# Altium PCB PCB1.PcbDoc
Units mm, origin at the board's own origin, x right, y up, seen from the top; angles counter-clockwise.
Board outline 95.76 x 55.24 mm, 2 copper layers (Top Layer, Bottom Layer); 31 components, 41 nets, 131 pads, 287 vias.
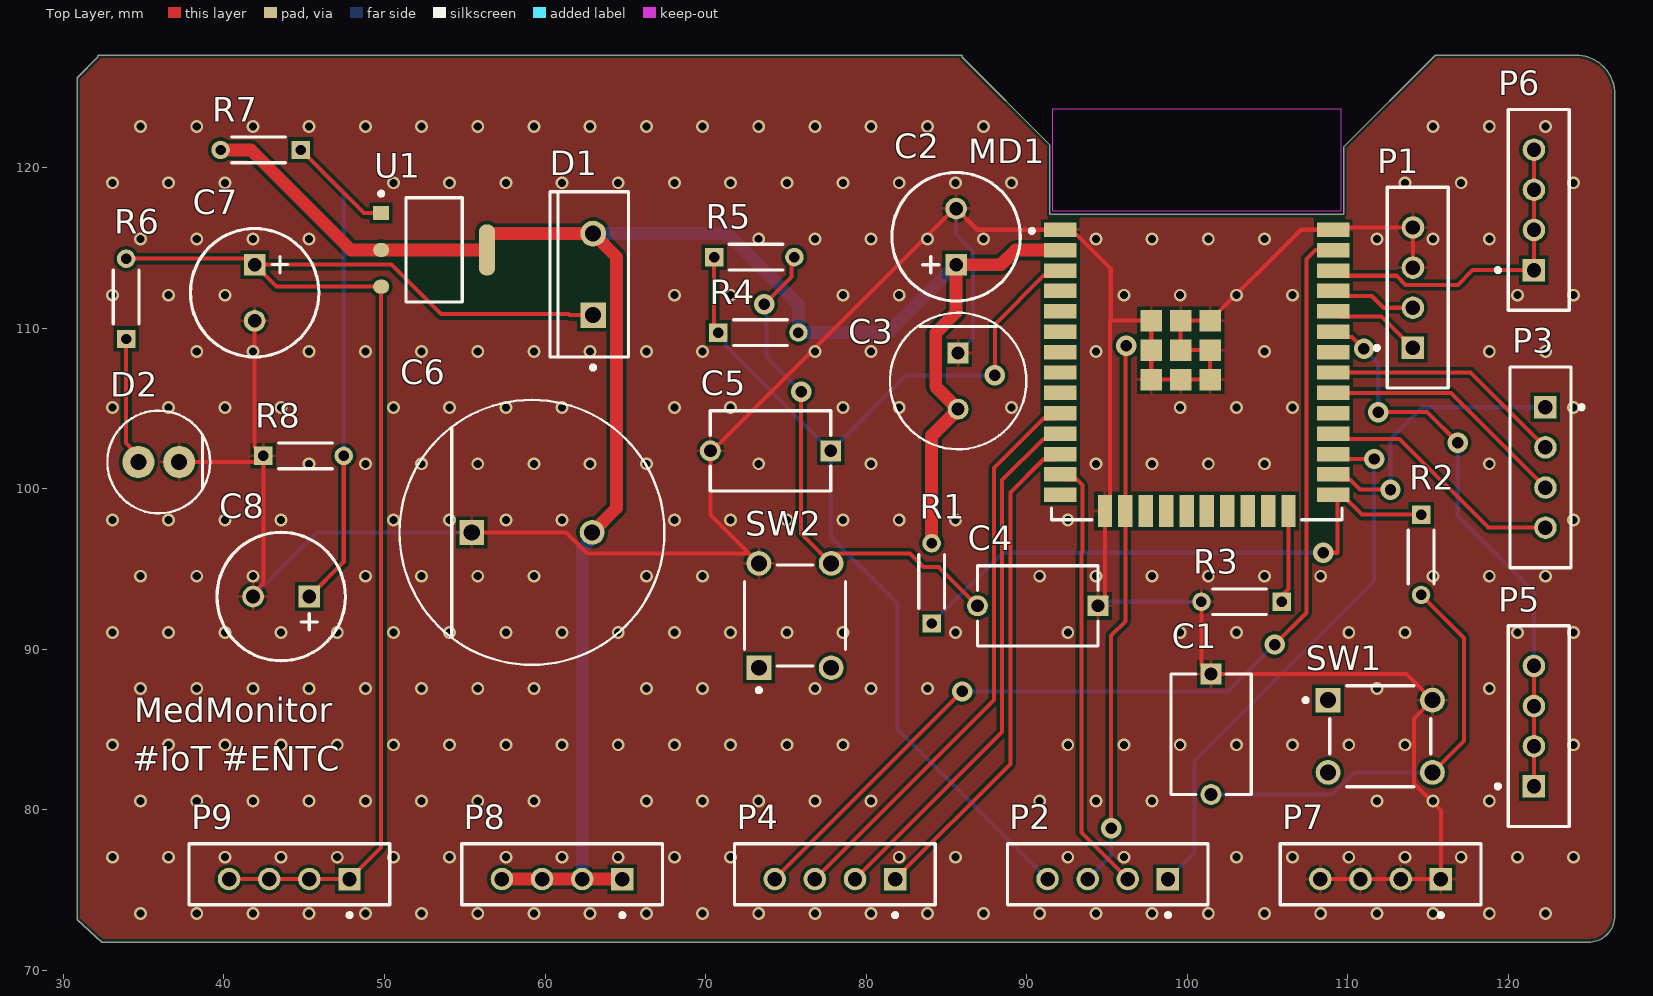
[diagram p0: Top Layer view]
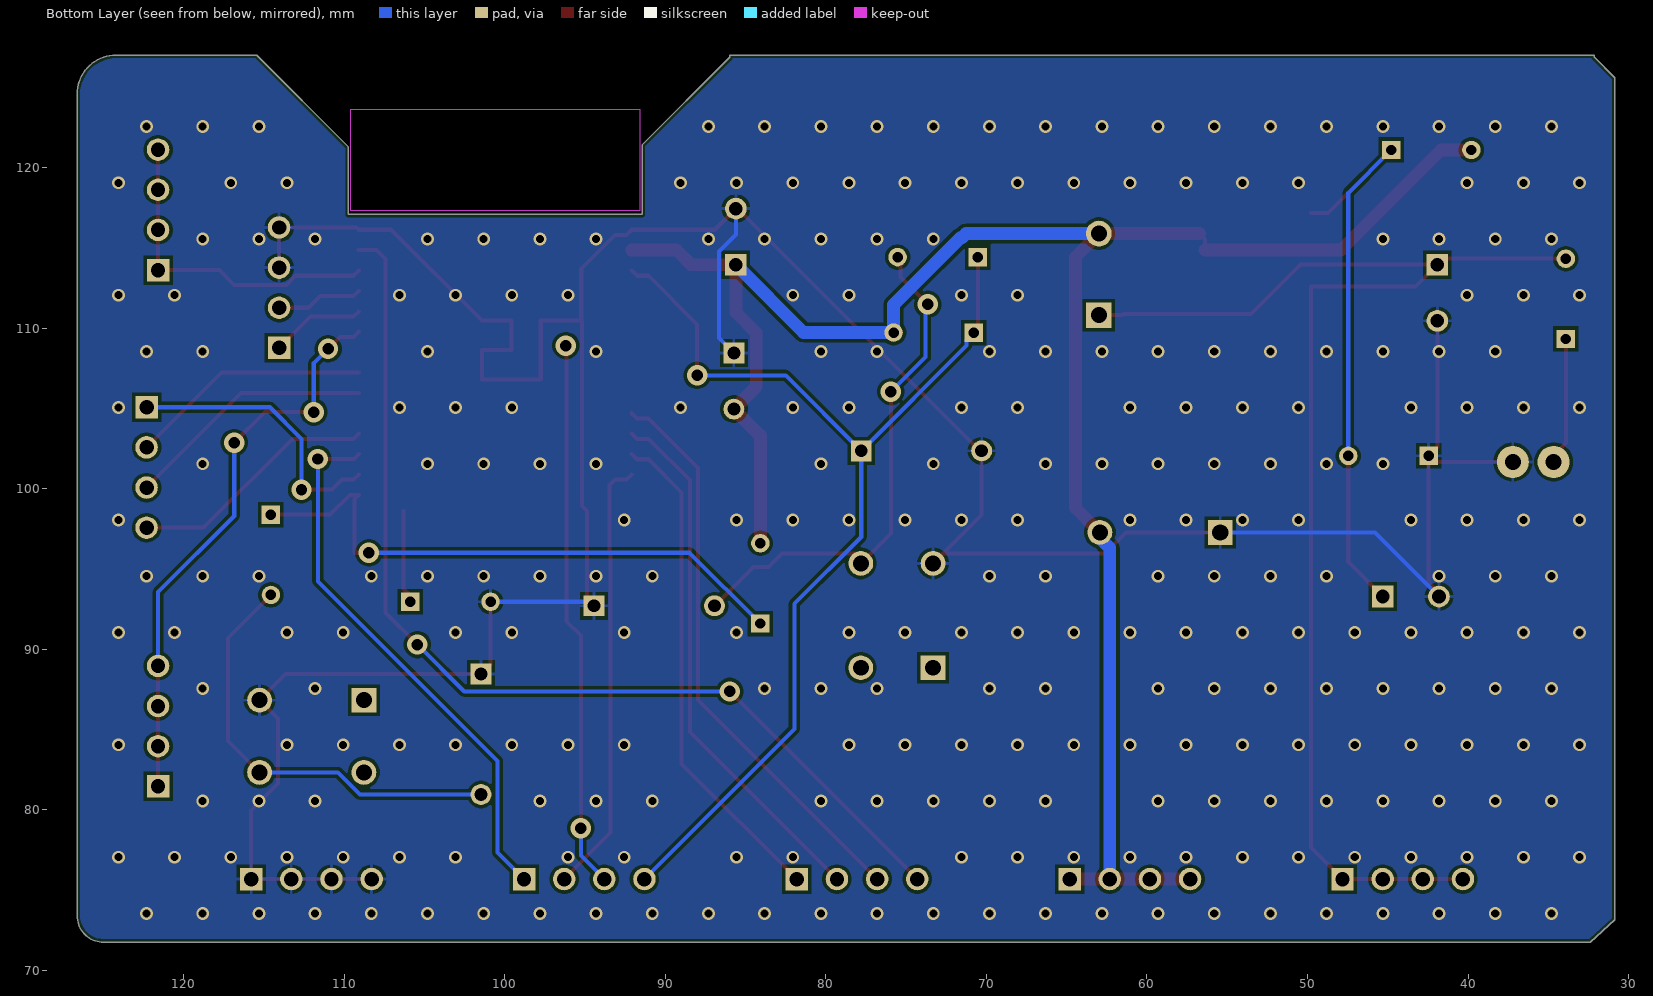
[diagram p1: Bottom Layer view, seen from below]
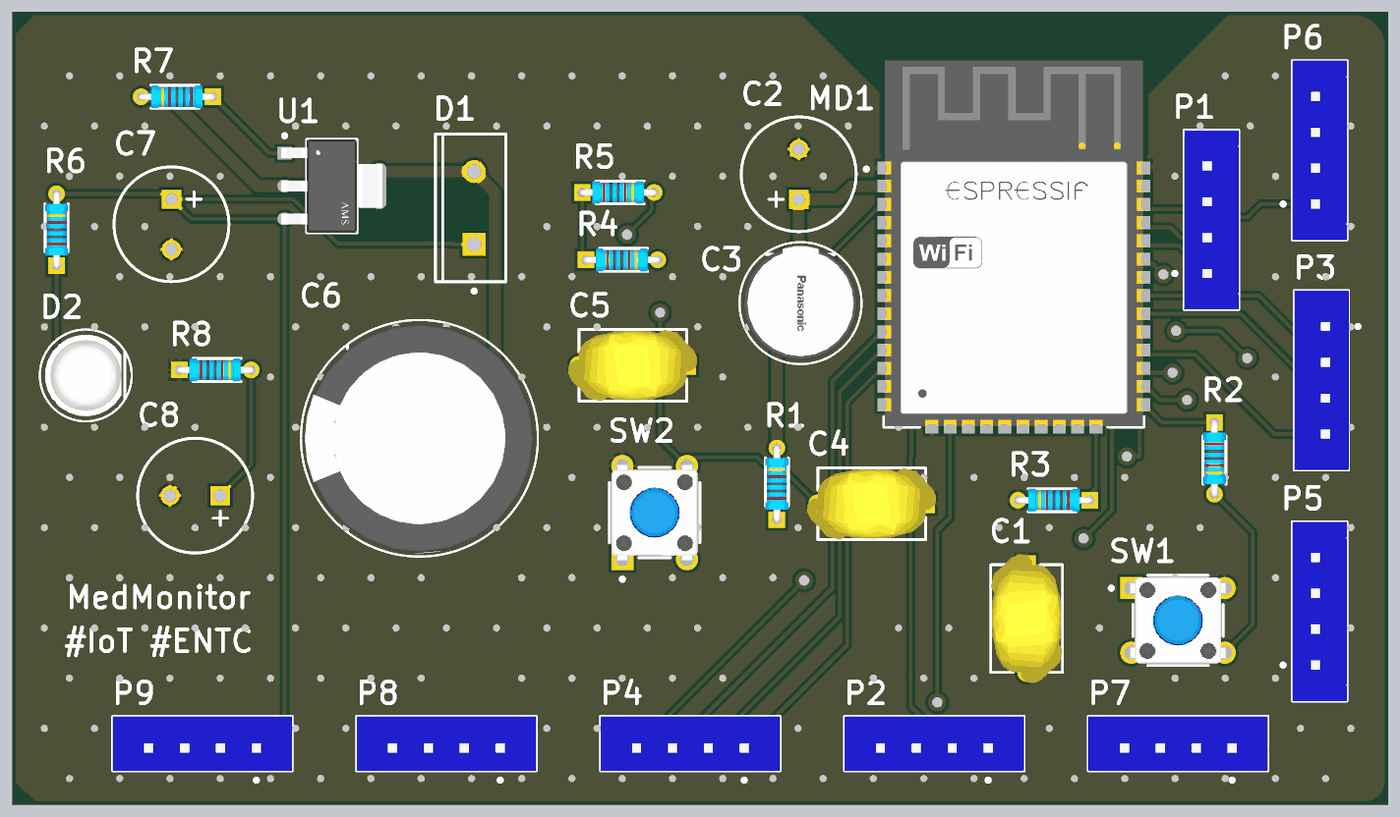
[diagram p2: 3D render of the assembled board from above, using the file's embedded part models]

## Layer stack, top to bottom
Top Solder: solder mask 0.0102, Solder Resist, Dk 3.5
Top Layer: signal copper 0.0356
Dielectric 1: dielectric 0.32, FR-4, Dk 4.8
Bottom Layer: signal copper 0.0356
Bottom Solder: solder mask 0.0102, Solder Resist, Dk 3.5

## Board outline
85.979,127 85.979,126.873 91.44,121.412 91.44,117.094 109.728,117.094 109.728,121.285 115.443,127 124.206,127 cw(c124.206,124.587) 126.619,124.587 126.619,73.406 cw(c124.968,73.406) 124.968,71.755 32.385,71.755 30.861,73.152 30.861,125.603 32.131,126.873 32.131,127

## Design rules (kind name [scope] priority, off if disabled: settings)
BoardOutlineClearance [All] p1: gap=0.2 ignorepadtopadclearanceinfootprint=FALSE
Clearance [All] p1: gap=0.203 ignorepadtopadclearanceinfootprint=FALSE except(0.25: Arc-Hole Track-Hole SMDPad-Hole THPad-Hole Via-Hole Fill-Hole Poly-Hole Region-Hole Text-Hole)
ComponentClearance [All] p1: gap=0.127 collisioncheckmode=3 verticalgap=0.127 showdistances=TRUE
DiffPairsRouting [All] p1: maxlimit=0.381 minlimit=0.203 mostfreqgap=0.203 toplayer_minwidth=0.203 toplayer_maxwidth=25.4 toplayer_prefwidth=0.203 bottomlayer_minwidth=0.203 bottomlayer_maxwidth=25.4 bottomlayer_prefwidth=0.203 maxuncoupledlength=12.7
Height [All] p1: minheight=0 maxheight=1816.048 prefheight=12.7
HoleSize [All] p1: absolutevalues=TRUE maxlimit=6.3 minlimit=0.3 maxpercent=80.000 minpercent=20.000
HoleToHoleClearance [All] p1: gap=0.25 allowstackedmicrovias=FALSE
MinimumAnnularRing [All] p1: minimumring=0.076
MinimumSolderMaskSliver [All] p1: minsoldermaskwidth=0
PlaneClearance [All] p1: clearance=0.203
PlaneConnect PlaneConnectPowerPads [InPadClass('PowerPads')] p1: planeconnectstyle=Direct reliefexpansion=0.508 reliefentries=4 reliefconductorwidth=0.254 reliefairgap=0.254
PlaneConnect [All] p2: pad.planeconnectstyle=Relief pad.reliefexpansion=0.3 pad.reliefentries=4 pad.reliefconductorwidth=0.203 pad.reliefairgap=0.203 via.planeconnectstyle=Direct via.reliefexpansion=0.3 via.reliefentries=4 via.reliefconductorwidth=0.127 via.reliefairgap=0.127
PolygonConnect PolygonConnectPowerPads [All vs (InPadClass('PowerPads'))] p1: connectstyle=Direct reliefconductorwidth=0.254 reliefentries=4 polygonreliefangle="90 Angle" airgapwidth=0.254
PolygonConnect [All] p2: thpad.connectstyle=Relief thpad.reliefconductorwidth=0.203 thpad.reliefentries=4 thpad.polygonreliefangle="90 Angle" thpad.airgapwidth=0.203 smdpad.connectstyle=Relief smdpad.reliefconductorwidth=0.203 smdpad.reliefentries=4 smdpad.polygonreliefangle="90 Angle" smdpad.airgapwidth=0.203 via.connectstyle=Direct via.reliefconductorwidth=0.127 via.reliefentries=4 via.polygonreliefangle="90 Angle" via.airgapwidth=0.127
RoutingVias [All] p1: holewidth=0.3 width=0.6 viastyle="Through Hole" minholewidth=0.3 minwidth=0.6 maxholewidth=0.6 maxwidth=6.6
SilkToSilkClearance [All] p1: silktosilkclearance=0
SilkToSolderMaskClearance [IsPad] p1: minsilkscreentomaskgap=0.127 clearancetoexposedcopper=TRUE
SolderMaskExpansion [All] p1: expansion=0.075 istentingtop=FALSE
Width [All] p1: maxlimit=25.4 minlimit=0.203 preferedwidth=0.203 minimp=50.000000 maximp=50.000000 favimp=50.000000
20 further rules are at their usual default settings.

## Components (designator, comment, footprint, x,y, rotation, side; value= is the part's Value field where it differs from the comment)
C1 "1nF" FP-VY2102M29Y5US6TV7-MFG 101.473,84.709 r270 top
C2 "100uF" NIC-RNS-8x11.5-2_V 85.598,115.697 r90 top
C3 "1uF" FP-ECA-2WHG010-MFG 85.725,106.708 r270 top
C4 "1nF" FP-VY2102M29Y5US6TV7-MFG 90.678,92.71 r180 top
C5 "1nF" FP-VY2102M29Y5US6TV7-MFG 74.041,102.362 r180 top
C6 "22uF" FP-RAD-TH-D_16_0_5-L_20_2-MFG 59.182,97.282 r0 top
C7 "10uF" NIC-RNS-8x11.5-2_V 41.91,112.208 r270 top
C8 "10uF" NIC-RNS-8x11.5-2_V 43.561,93.285 r180 top
D1 "BYW80-200G" ONSC-TO-220-2-221B-04_E 62.992,113.351 r180 top
D2 "SFH 4550" FP-SFH_4550-MFG 35.941,101.667 r180 top
MD1 "ESP32-WROOM-32D" FP-ESP32-WROOM-32D-MFG 100.584,110.871 r0 top
P1 "B4B-EH-A(LF)(SN)" JST-B4B-EH-A_V 114.046,112.522 r90 top
P2 "B4B-EH-A(LF)(SN)" JST-B4B-EH-A_V 95.043,75.692 r180 top
P3 "B4B-EH-A(LF)(SN)" JST-B4B-EH-A_V 122.301,101.326 r270 top
P4 "B4B-EH-A(LF)(SN)" JST-B4B-EH-A_V 78.051,75.692 r180 top
P5 "B4B-EH-A(LF)(SN)" JST-B4B-EH-A_V 121.587,85.217 r90 top
P6 "B4B-EH-A(LF)(SN)" JST-B4B-EH-A_V 121.587,117.368 r90 top
P7 "B4B-EH-A(LF)(SN)" JST-B4B-EH-A_V 112.034,75.692 r180 top
P8 "B4B-EH-A(LF)(SN)" JST-B4B-EH-A_V 61.06,75.692 r180 top
P9 "B4B-EH-A(LF)(SN)" JST-B4B-EH-A_V 44.069,75.692 r180 top
R1 "5k" FP-MRS1600-MFG 84.074,94.107 r90 top
R2 "470Ohm" FP-MRS1600-MFG 114.554,95.885 r270 top
R3 "5k" FP-MRS1600-MFG 103.378,92.964 r180 top
R4 "12k" FP-MRS1600-MFG 73.279,109.728 r0 top
R5 "470Ohm" FP-MRS1600-MFG 73.025,114.427 r0 top
R6 "2k" FP-MRS1600-MFG 33.909,111.827 r90 top
R7 "330" FP-MRS1600-MFG 42.291,121.098 r180 top
R8 "540" FP-MRS1600-MFG 44.958,102.048 r0 top
SW1 "1-1825910-0" FP-1-1825910-0-MFG 112.014,84.582 r180 top
SW2 "1-1825910-0" FP-1-1825910-0-MFG 75.565,92.102 r270 top
U1 "AMS1117-3.3" FP-AMS1117-IPC_C 53.086,114.875 r0 top

## Footprints (in the part's own frame and the unit in brackets; to place one, negate y for a bottom-side part, rotate by r counter-clockwise, add the part's x,y. Pads: shape width x height; smd on the part's side, far side on the other; paste and mask are expansions set on the pad)
FP-1-1825910-0-MFG [mm]
  rect 1.54x1.54 hole 0.99 paste-2539.97 mask+0: 1(3.25,-2.25)
  round 1.54 hole 0.99 paste-2539.97 mask+0: 2(-3.25,-2.25) 3(3.25,2.25) 4(-3.25,2.25)
  silkscreen extent -3.14,-3.14 4.77,3.14, body extent -4.12,-3.24 4.12,3.24, height 0.25
FP-AMS1117-IPC_C [mm]
  rect 1.004x0.872 smd paste+0 mask+0: 1(-3.295,2.29)
  rrect100% 1.004x0.872 smd paste+0 mask+0: 2(-3.295,0) 3(-3.295,-2.29)
  rrect87% 1.004x3.182 smd paste+0 mask+0: 4(3.295,0)
  silkscreen extent -3.42,-3.25 1.75,3.62, body extent -3.9,-3.35 3.9,3.35, height 0.25
FP-ECA-2WHG010-MFG [mm]
  rect 1.3x1.3 hole 0.8 paste-2539.97 mask+0: 1(-1.75,0)
  round 1.3 hole 0.8 paste-2539.97 mask+0: 2(1.75,0)
  silkscreen extent -4.25,-4.25 4.25,4.25, body extent -4.35,-4.35 4.35,4.35, height 0.25
FP-ESP32-WROOM-32D-MFG [mm]
  rect 2x0.9 smd paste+0 mask+0: 1(-8.5,5.26) 2(-8.5,3.99) 3(-8.5,2.72) 4(-8.5,1.45) 5(-8.5,0.18) 6(-8.5,-1.09) 7(-8.5,-2.36) 8(-8.5,-3.63) 9(-8.5,-4.9) 10(-8.5,-6.17) 11(-8.5,-7.44) 12(-8.5,-8.71) 13(-8.5,-9.98) 14(-8.5,-11.25) 25(8.5,-11.25) 26(8.5,-9.98) 27(8.5,-8.71) 28(8.5,-7.44) 29(8.5,-6.17) 30(8.5,-4.9) 31(8.5,-3.63) 32(8.5,-2.36) 33(8.5,-1.09) 34(8.5,0.18) 35(8.5,1.45) 36(8.5,2.72) 37(8.5,3.99) 38(8.5,5.26)
  rect 0.9x2 smd paste+0 mask+0: 15(-5.715,-12.25) 16(-4.445,-12.25) 17(-3.175,-12.25) 18(-1.905,-12.25) 19(-0.635,-12.25) 20(0.635,-12.25) 21(1.905,-12.25) 22(3.175,-12.25) 23(4.445,-12.25) 24(5.715,-12.25)
  rect 1.33x1.33 smd paste+0 mask+0: 39(-2.835,-4.075) 39(-2.835,-2.24) 39(-2.835,-0.405) 39(-1,-4.075) 39(-1,-2.24) 39(-1,-0.405) 39(0.835,-4.075) 39(0.835,-2.24) 39(0.835,-0.405)
  Keep-Out Layer region: -9,6.45 9,6.45 9,12.75 -9,12.75
  Keep-Out Layer region: -9,6.45 9,6.45 9,12.75 -9,12.75
  silkscreen extent -10.4,-12.8 9.05,5.31, body extent -9.6,-13.35 9.6,12.9, height 0.25
FP-MRS1600-MFG [mm]
  rect 1.15x1.15 hole 0.65 paste-2539.97 mask+0: 1(-2.5,0)
  round 1.15 hole 0.65 paste-2539.97 mask+0: 2(2.5,0)
  silkscreen extent -1.55,-0.8 1.8,0.8, body extent -3.17,-0.9 3.17,0.9, height 0.25
FP-RAD-TH-D_16_0_5-L_20_2-MFG [mm]
  rect 1.55x1.55 hole 1 paste-2539.97 mask+0: 1(-3.75,0)
  round 1.55 hole 1 paste-2539.97 mask+0: 2(3.75,0)
  silkscreen extent -8.25,-8.25 8.25,8.25, body extent -8.35,-8.35 8.35,8.35, height 0.25
FP-SFH_4550-MFG [mm]
  round 2 hole 1 paste-2539.97 mask+0: 1(-1.27,0) 2(1.27,0)
  silkscreen extent -3.2,-3.2 3.2,3.2, body extent -3.05,-3.05 3.05,3.05, height 0.25
FP-VY2102M29Y5US6TV7-MFG [mm]
  rect 1.3x1.3 hole 0.8 paste-2539.97 mask+0: 1(-3.75,0)
  round 1.3 hole 0.8 paste-2539.97 mask+0: 2(3.75,0)
  silkscreen extent -3.75,-2.5 3.75,2.5, body extent -4.5,-2.6 4.5,2.6, height 0.25
JST-B4B-EH-A_V [mm] "Header, 4-Leads, Body 12.5x3.8mm, Pitch 2.5mm"
  rect 1.4x1.4 hole 0.9: 1(-3.75,0)
  round 1.4 hole 0.9: 2(-1.25,0) 3(1.25,0) 4(3.75,0)
  silkscreen extent -6.25,-2.2 6.25,2.37, body extent -6.25,-2.2 6.25,1.6, height 6
NIC-RNS-8x11.5-2_V [mm] "THD, 2-Leads, Dia 8mm, Body Length 11.5mm, Pin Spacing 3.5mm"
  rect 1.35x1.35 hole 0.85: 1(-1.75,0)
  round 1.35 hole 0.85: 2(1.75,0)
  silkscreen extent -4,-4 4,4, body extent -4,-4 4,4, height 13
ONSC-TO-220-2-221B-04_E [mm] "FM, 2-Leads, Body 10.3x4.85mm, Pitch 5.08mm"
  rect 1.6x1.6 hole 1: 1(0,2.54)
  round 1.6 hole 1: 3(0,-2.54)
  silkscreen extent -2.21,-5.15 2.69,5.92, body extent -2.18,-5.15 2.67,5.15, height 19.05

## Part data
C1 C4 C5: library part CMP-00030-42817980-1, "VY2102M29Y5US6TV7 Cap Ceramic Suppression X1/Y2 0.001uF 440VAC/300VAC Y5U 20% (7.5 X 5mm) Radial 7.5mm 125C T/R", Case/Package=Radial, Dielectric=Y5U, Max Operating Temperature=125°C, Min Operating Temperature=-40°C, Tolerance=20%, Voltage=300V, Voltage Rating=1kV, Capacitance=1nF, Composition=Ceramic, Depth=5mm, Diameter=7.5mm, Height=10.5mm, Height - Seated (Max)=11.5062mm, Lead Diameter=600µm, Lead Free="Lead Free", Lead Pitch=7.5mm, Lead/Base Style=Kinked, Material=Ceramic, Mount="Through Hole", NexarPartId=42817980, Packaging="Tape & Reel (TR)", Radiation Hardening=No, REACH SVHC=Unknown, RoHS=Compliant, Schedule B="8532230060, 8532230060", Termination=Radial, Voltage Rating (AC)=300V
C2 C7 C8: library part CMP-1235-00001-1, "Aluminum Electrolytic Capacitor, 100 uF +/-20%, 10 V, -55 to 105 degC, 2-Pin THD, RoHS", Capacitance Tolerance=+/-20%, Leakage Current="0.15 mA", Manufacturer=Nichicon, PartNumber=RNS1A101MDN1KX, Rated Capacitance="100 uF", Rated Voltage="10 V", Temperature Range="-55 to 105 degC", ComponentLink1Description="Manufacturer URL", ComponentLink1URL=http://www.nichicon.co.jp/, ComponentLink2Description=Datasheet, ComponentLink2URL=http://www.nichicon.co.jp/english/products/pdfs/e-ns.pdf, ComponentLink3Description="Package Specification", ComponentLink3URL=http://www.nichicon.co.jp/english/products/pdf/2013fpcap_catalog_ns.pdf, DatasheetVersion=Sep-13, Mounting Technology="Through Hole", PackageDescription="2-Pin Through Hole Device, Dia 8 mm, Body Length 11.5 mm, Pin Spacing 3.5 mm", Rated Ripple="3900 mA", RoHS=TRUE
C3: library part CMP-00287-55558411-1, "ECA-2WHG010 Aluminum Electrolytic Capacitor, 1 uF, 450 V, ± 20%, 2000 hours @ 105°C, Radial Leaded", Capacitance=1µF, Case/Package=Radial, Dielectric Material=Aluminium, Max Operating Temperature=105°C, Min Operating Temperature=-25°C, Ripple Current=18mA, Tolerance=20%, Voltage=450V, Contact Plating=Tin, Diameter=8mm, Dissipation Factor=0.24%, Height=11.5mm, Height - Seated (Max)=12.4968mm, Lead Diameter=600µm, Lead Free="Lead Free", Lead Pitch=3.5mm, Lead/Base Style=Straight, Length=11.5mm, Life (Hours)=2000hours, Mount="PCB, Through Hole", NexarPartId=55558411, Number of Pins=2, Packaging=Bulk, Radiation Hardening=No, REACH SVHC="No SVHC", RoHS=Compliant, Schedule B="8532220020, 8532220020", Termination=Radial, Voltage Rating=450V, Voltage Rating (AC)=450V, Voltage Rating (DC)=450V, Width=8mm
C6: library part CMP-05427-000893-1, "Aluminum Electrolytic Capacitors (Radial Lead Type) 22uF ±20% 450V", Case/Package=Radial, Dielectric Material=Aluminium, Leakage Current=604uA, Max Operating Temperature=105°C, Min Operating Temperature=-25°C, Package Quantity=100, Ripple Current=945mA, Tolerance=20%, Voltage=450V, Capacitance=22uF, Construction=RADIAL, Contact Plating=Tin, Diameter=16mm, Dissipation Factor=0.24%, Height=20mm, Height - Seated (Max)=0.787inch, Lead Diameter=0.8mm, Lead Free="Lead Free", Lead Pitch=7.5mm, Length=20mm, Life (Hours)=10000Hour, Mount="Through Hole", Packaging=Bulk, Radiation Hardening=No, REACH SVHC="No SVHC", RoHS Compliant=Yes, Series=EE, Termination=Radial, Voltage Rating=450V, Voltage Rating (DC)=450V
D1: library part CMP-0902-00381-1, "SWITCHMODE(TM) Power Rectifier, 2-Pin TO-220, Pb-Free, Tube", Manufacturer="On Semiconductor", ComponentLink1Description="Manufacturer URL", ComponentLink1URL=http://www.onsemi.com/, ComponentLink2Description=Datasheet, ComponentLink2URL=http://www.onsemi.com/pub_link/Collateral/BYW80-D.PDF, ComponentLink3Description="Package Specification", ComponentLink3URL=http://www.onsemi.com/pub_link/Collateral/BYW29-D.PDF, DatasheetVersion="Rev. 3", IFSM Max (A)=100, Mounting Technology="Through Hole", PackageDescription="2-Pin Flange Mount, Vertical Straight Lead, Body 9.97 x 4.44 mm, Pitch 5.08 mm", PackageReference=TO-220-2-221B-04_E, PackageVersion="Rev. E", Packing=Tube, PartNumber=BYW80-200G, RoHS=TRUE, Type=Ultrafast, VRRM Max (V)=200
D2: library part CMP-62016-000011-1, "EMITTER IR 860NM 100MA RADIAL", Colour=Infrared, Forward Current=100mA, Forward Voltage=1.5V, Manufacturer="Osram Opto", Reverse Voltage=5V, Temperature="-40°C to +100°C", Temperature Range High=+100°C, Temperature Range Low=-40°C, Automotive=No, Category=Diode, ComponentLink2Description=Datasheet, ComponentLink2URL=https://dammedia.osram.info/media/resource/hires/osram-dam-5580407/SFH%204550_EN.pdf, Device Class L1=Optoelectronics, Device Class L2=LEDs, Device Class L3=unset, Digikey Description="EMITTER IR 860NM 100MA RADIAL", Lead Free=Yes, Led Orientation=Straight, Manufacturer Part Number="SFH 4550", Mouser Description="Infrared Emitters - High Power Infrared 850 nm HALF ANGLE +/-3DEG", Octopart=https://octopart.com/sfh+4550-osram+opto-55410894, Package="SFH 4550", Peak Emmision Wavelength=860nm, RoHS=TRUE, Viewing Angle=6°
MD1: library part CMP-194065-000003-1, "WIFI MODULE 32MBITS SPI FLASH", Manufacturer="Espressif Systems", Max Frequency=2484MHz, Max Supply Voltage=3.6V, Min Supply Voltage=3V, Nominal Supply Current=500mA, Temperature="-40°C to +85°C", Temperature Range High=+85°C, Temperature Range Low=-40°C, Automotive=No, Bandwidth=72MHz, Category=UNK, ComponentLink2Description=Datasheet, ComponentLink2URL=https://www.espressif.com/sites/default/files/documentation/esp32-wroom-32d_esp32-wroom-32u_datasheet_en.pdf, Data Rate=150Mbits/s, Device Class L1="Integrated Circuits (ICs)", Device Class L2="RF Semiconductors and Devices", Device Class L3=Transceivers, Digikey Description="WIFI MODULE 32MBITS SPI FLASH", Height=3.2mm, Interface=I2C,SPI,UART,Ethernet,I2S,Other, Lead Free=Yes, Manufacturer Part Number=ESP32-WROOM-32D, Mouser Description="Wi-Fi/BT BLE Module ESP32-D0WD, SPI Flash, UART, P", Number Of Adc Channels=16, Number Of Gpio=32, Octopart=https://octopart.com/esp32-wroom-32d-espressif+systems-91040050, Package=ESP32-WROOM-32D, RoHS=TRUE, Sensitivity=-98dBm
P1 P2 P3 P4 P5 P6 P7 P8 P9: library part CMP-2000-05904-1, "Male Header, Pitch 2.5 mm, 1 x 4 Position, Height 6 mm, Tail Length 3.2 mm, -25 to 85 degC, RoHS, Bulk", Manufacturer=JST, Package Description="Male Header, Pitch 2.5 mm, 1 x 4 Position, Height 6 mm, Tail Length 3.2 mm", Package Reference=B4B-EH-A, Datasheet URL=http://www.jst-mfg.com/product/pdf/eng/eEH.pdf, Datasheet Version=12/2012, Manufacturer URL=http://www.jst.com/home2.html, Mounting Technology=SurfaceMount, No of Positions=4, Pitch=2.5mm, Style/Orientation=StraightHeader/Plug, Termination=Crimp, Type=ShroudedHeader
R1 R2 R3 R4 R5 R6 R7 R8: library part CMP-02408-000019-1, "RES 20K OHM 0.4W 1% AXIAL", Case/Package=Conformal, Max Operating Temperature=155°C, Max Power Dissipation=400mW, Min Operating Temperature=-55°C, Resistance=20kR, Resistor Type="Metal Film", Temperature Coefficient=50ppm/°C, Tolerance=1%, Construction=Cylindrical, Contact Plating=Tin, Diameter=1.6mm, Length=3.6mm, Military Standard=Not, Mount="Through Hole", Number of Terminations=2, Packaging="Tape and Reel", Power Rating=400mW, Radiation Hardening=No, RoHS Compliant=Yes, Series=MRS16, Technology="THIN FILM", Termination=Axial
SW1 SW2: library part CMP-03407-000018-1, "SWITCH TACTILE SPST-NO 0.05A 24V", Actuator Color=Blue, Contact Current Rating=50mA, Contact Resistance=100mR, Max Operating Temperature=85°C, Max Voltage Rating (DC)=24V, Min Operating Temperature=-35°C, Operating Force=1.56N, Package Quantity=750, Actuator Length=3.4mm, Actuator Material=Nylon, Actuator Type=Standard, Contact Material=Brass, Contact Plating=Silver, Depth=5.99mm, Electrical Life=100000Cycles, Illumination Type=Non-Illuminated, Length=5.99mm, Max Current Rating=50mA, Mechanical Life=100000Cycles, Mount="Through Hole", Orientation=Straight, Packaging="Loose Piece", Radiation Hardening=No, RoHS Compliant=Yes, Series="FSMJ, Alcoswitch", Switch Function=Off-Mom, Switch Travel=0.25mm, Termination="PC Pins", Throw Configuration=SPST, Type=Switch, Voltage Rating (DC)=24V
U1: library part CMP-209535-000001-1, "LDO Voltage Regulators 1A, 3.3V", Dropout Voltage=1.1V, Manufacturer="Advanced Monolithic Systems", Max Junction Temp=+125°C, Max Power Dissipation=1.2W, Max Supply Voltage=15V, Nominal Supply Current=5mA, Output Current=1A, Output Voltage=3.3V, Package=AMS1117, Temperature="-40°C to +125°C", Temperature Range Low=-40°C, Automotive=No, Category=IC, ComponentLink2Description=Datasheet, ComponentLink2URL=http://www.advanced-monolithic.com/pdf/ds1117.pdf, Device Class L1="Integrated Circuits (ICs)", Device Class L2="Power Management ICs", Device Class L3="Voltage Regulators - Linear", Height=1.8mm, Ipc Land Pattern Name=SOT229P700X180-4, Lead Free=Yes, Manufacturer Part Number=AMS1117-3.3, Number Of Outputs=1, Octopart=https://octopart.com/ams1117-3.3-advanced+monolithic+systems-25899300, Output Type=Fixed, RoHS=TRUE, Standoff Height=0.64mm, Temperature Range High=+125°C

## Via types
v1: diameter 0.8, hole 0.5, Top Layer to Bottom Layer, tented both sides, 274 vias
v2: diameter 1.27, hole 0.711, Top Layer to Bottom Layer, tented both sides, 13 vias

## Nets (pads, with @x,y where several pads share a name; then routed paths per layer and width w, separated by ;. In a path a pad name is that pad's centre, name@x,y a point inside that pad or via, vN(x,y) a via of type N, cw(c..) or ccw(c..) an arc to the next point about the centre after c; other vN are vias at no path point)
+3.3v: C2.1 C3.2 C6.2 D1.3 MD1.2 P8.1 P8.2 P8.3 P8.4 R1.2 R4.2 R7.2 U1.2 U1.4 | length 129.7
  Top Layer w0.254: U1.4 56.381,115.539 U1.4@56.733,115.891 ; P8.4@57.294,75.709 P8.4
  Top Layer w0.8: R7.2 41.684,121.098 47.907,114.875 U1.2 U1.4 ; U1.4@56.733,115.891 D1.3 64.446,114.437 64.446,98.796 C6.2 ; P8.4 P8.3 P8.2 P8.1 ; R1.2 84.074,103.307 C3.2 84.328,106.355 84.328,109.707 85.598,110.977 C2.1 88.383,113.947 89.297,114.861 MD1.2
  Bottom Layer w0.254: C6.2@62.932,96.931 C6.2
  Bottom Layer w0.8: P8.2 62.31,96.31 C6.2@62.932,96.931 ; D1.3 71.269,115.891 71.504,115.656 71.587,115.656 75.779,111.464 R4.2 81.379,109.728 C2.1
+5v: C7.1 D1.1 P9.1 P9.2 P9.3 P9.4 R6.2 U1.3 | length 84.5
  Top Layer w0.254: R6.2 41.541,114.327 C7.1 ; P9.4 P9.3 P9.2 ; P9.2@45.319,75.991 P9.2 ; D1.1 61.528,110.811 61.468,110.871 53.507,110.871 50.42,113.958 C7.1 ; C7.1 43.283,112.585 U1.3 49.791,77.664 P9.1 P9.2
CLK: MD1.20
CMD: MD1.19
EN: C5.1 MD1.3 P2.4 R4.1 R5.1 | length 68.1
  Top Layer w0.254: R5.1 70.525,109.982 R4.1 ; v2(88.011,107.061) 88.011,110.237 91.042,113.268 91.761,113.268 MD1.3
  Bottom Layer w0.254: R4.1 71.227,109.28 71.227,108.926 C5.1 ; v2(88.011,107.061) 82.49,107.061 C5.1 ; P2.4 81.955,85.03 81.955,92.839 77.791,97.003 C5.1
GND: C1.1 C2.2 C3.1 C4.1 C5.2 C6.1 C7.2 C8.2 D2.1 MD1.1 MD1.15 MD1.38 MD1.39 P1.3 P1.4 P7.1 P7.2 P7.3 P7.4 R3.2 R8.1 SW1.2 SW2.2 | length 208.9
  Top Layer w0.254: D2.1 42.077,101.667 R8.1 ; C8.2 41.811,93.484 42.458,94.131 R8.1 ; C7.2 41.91,102.596 R8.1 ; C6.1 61.297,97.282 62.619,95.96 72.707,95.96 ; SW2.2 72.707,95.96 ; C4.1 C4.1@94.915,93.197 ; C4.1@94.951,93.233 C4.1@94.915,93.197 ; R3.2 100.878,89.054 C1.1 113.637,88.459 SW1.2 114.113,85.681 114.113,81.634 115.784,79.964 P7.1 P7.2 P7.3 P7.4 ; R3.2@100.878,93.183 R3.2@100.878,93.345 ; P1.3 P1.4 109.225,116.272 MD1.38 107.084,116.131 101.419,110.466 99.584,110.466 99.584,108.631 101.419,108.631 101.419,106.796 99.584,106.796 97.749,106.796 97.749,108.631 97.749,110.466 95.226,110.466 ; 72.707,95.96 70.291,98.376 C5.2 70.402,102.362 85.487,117.447 C2.2 86.914,116.131 MD1.1 92.407,115.808 93.126,115.808 95.226,113.707 95.226,110.466 ; C4.1@94.915,93.197 94.869,93.243 MD1.15 95.174,98.926 95.174,110.413 95.226,110.466
  Bottom Layer w0.254: C8.2 45.808,97.282 C6.1 ; C2.2 85.598,115.836 86.654,114.78 86.654,109.387 C3.1 ; C4.1 94.682,92.964 R3.2
  other v1: 34.805,73.555 38.305,73.555 41.805,73.555 45.305,73.555 48.805,73.555 52.305,73.555 55.805,73.555 59.305,73.555 62.805,73.555 66.305,73.555 69.805,73.555 73.305,73.555 76.805,73.555 80.305,73.555 83.805,73.555 87.305,73.555 90.805,73.555 94.305,73.555 97.805,73.555 101.305,73.555 104.805,73.555 108.305,73.555 111.805,73.555 115.305,73.555 118.805,73.555 122.305,73.555 33.055,77.055 36.555,77.055 40.055,77.055 43.555,77.055 47.055,77.055 50.555,77.055 54.055,77.055 57.555,77.055 61.055,77.055 64.555,77.055 68.055,77.055 71.555,77.055 82.055,77.055 85.555,77.055 92.555,77.055 96.055,77.055 103.055,77.055 106.555,77.055 110.055,77.055 113.555,77.055 117.055,77.055 120.555,77.055 124.055,77.055 34.805,80.555 38.305,80.555 41.805,80.555 45.305,80.555 48.805,80.555 52.305,80.555 55.805,80.555 59.305,80.555 66.305,80.555 69.805,80.555 73.305,80.555 76.805,80.555 80.305,80.555 90.805,80.555 94.305,80.555 97.805,80.555 111.805,80.555 115.305,80.555 118.805,80.555 33.055,84.055 36.555,84.055 40.055,84.055 43.555,84.055 47.055,84.055 50.555,84.055 54.055,84.055 57.555,84.055 61.055,84.055 64.555,84.055 68.055,84.055 71.555,84.055 75.055,84.055 78.555,84.055 92.555,84.055 96.055,84.055 99.555,84.055 103.055,84.055 106.555,84.055 110.055,84.055 113.555,84.055 124.055,84.055 34.805,87.555 38.305,87.555 41.805,87.555 45.305,87.555 48.805,87.555 52.305,87.555 55.805,87.555 59.305,87.555 66.305,87.555 69.805,87.555 76.805,87.555 80.305,87.555 83.805,87.555 111.805,87.555 118.805,87.555 33.055,91.055 36.555,91.055 40.055,91.055 43.555,91.055 47.055,91.055 50.555,91.055 54.055,91.055 57.555,91.055 61.055,91.055 64.555,91.055 68.055,91.055 71.555,91.055 75.055,91.055 78.555,91.055 85.555,91.055 92.555,91.055 99.555,91.055 103.055,91.055 110.055,91.055 113.555,91.055 120.555,91.055 124.055,91.055 34.805,94.555 38.305,94.555 41.805,94.555 48.805,94.555 52.305,94.555 55.805,94.555 59.305,94.555 66.305,94.555 69.805,94.555 90.805,94.555 94.305,94.555 97.805,94.555 101.305,94.555 104.805,94.555 108.305,94.555 115.305,94.555 118.805,94.555 122.305,94.555 33.055,98.055 36.555,98.055 40.055,98.055 43.555,98.055 50.555,98.055 54.055,98.055 57.555,98.055 61.055,98.055 68.055,98.055 71.555,98.055 75.055,98.055 78.555,98.055 82.055,98.055 85.555,98.055 92.555,98.055 124.055,98.055 45.305,101.555 48.805,101.555 52.305,101.555 55.805,101.555 59.305,101.555 62.805,101.555 66.305,101.555 73.305,101.555 80.305,101.555 94.305,101.555 97.805,101.555 101.305,101.555 104.805,101.555 118.805,101.555 33.055,105.055 36.555,105.055 40.055,105.055 43.555,105.055 50.555,105.055 54.055,105.055 57.555,105.055 61.055,105.055 68.055,105.055 71.555,105.055 78.555,105.055 82.055,105.055 89.055,105.055 99.555,105.055 103.055,105.055 106.555,105.055 124.055,105.055 38.305,108.555 41.805,108.555 45.305,108.555 48.805,108.555 52.305,108.555 55.805,108.555 59.305,108.555 62.805,108.555 66.305,108.555 69.805,108.555 76.805,108.555 80.305,108.555 94.305,108.555 104.805,108.555 118.805,108.555 122.305,108.555 33.055,112.055 36.555,112.055 40.055,112.055 68.055,112.055 71.555,112.055 78.555,112.055 82.055,112.055 96.055,112.055 99.555,112.055 103.055,112.055 106.555,112.055 120.555,112.055 124.055,112.055 34.805,115.555 38.305,115.555 41.805,115.555 45.305,115.555 73.305,115.555 76.805,115.555 80.305,115.555 83.805,115.555 87.305,115.555 94.305,115.555 97.805,115.555 101.305,115.555 104.805,115.555 111.805,115.555 115.305,115.555 118.805,115.555 33.055,119.055 36.555,119.055 40.055,119.055 50.555,119.055 54.055,119.055 57.555,119.055 61.055,119.055 64.555,119.055 68.055,119.055 71.555,119.055 75.055,119.055 78.555,119.055 82.055,119.055 85.555,119.055 89.055,119.055 113.555,119.055 117.055,119.055 124.055,119.055 34.805,122.555 38.305,122.555 41.805,122.555 45.305,122.555 48.805,122.555 52.305,122.555 55.805,122.555 59.305,122.555 62.805,122.555 66.305,122.555 69.805,122.555 73.305,122.555 76.805,122.555 80.305,122.555 83.805,122.555 87.305,122.555 115.305,122.555 118.805,122.555 122.305,122.555
IO0: MD1.25 R1.1 R2.1 | length 36.8
  Top Layer w0.254: v2(108.458,96.012) 109.347,96.012 109.347,99.358 MD1.25 109.634,99.621 110.87,98.385 R2.1
  Bottom Layer w0.254: R1.1 88.479,96.012 v2(108.458,96.012)
IO2: MD1.24 R3.1 | length 5.5
  Top Layer w0.254: R3.1@105.878,93.345 106.299,93.766 MD1.24
IO4: MD1.26 P3.1 | length 17.6
  Top Layer w0.254: MD1.26 109.407,100.568 110.126,100.568 110.745,99.949 v2(112.649,99.949)
  Bottom Layer w0.254: v2(112.649,99.949) 112.649,103.108 114.617,105.076 P3.1
IO5: MD1.29
IO12: MD1.14
IO13: MD1.16 P2.3 | length 34.2
  Top Layer w0.254: v2(95.25,78.867) 95.25,90.857 96.139,91.746 MD1.16 96.139,108.864 v2(96.19,108.915)
  Bottom Layer w0.254: P2.3 95.25,77.149 v2(95.25,78.867)
IO14: MD1.13 P2.2 | length 27.4
  Top Layer w0.254: MD1.13 92.407,100.568 93.126,100.568 93.465,100.229 93.465,96.099 93.397,96.032 93.397,78.588 P2.2
IO15: MD1.23
IO16: MD1.27 P2.1 | length 34.2
  Top Layer w0.254: MD1.27 109.391,101.854 v2(111.633,101.854)
  Bottom Layer w0.254: P2.1 100.442,77.341 100.442,83.039 111.633,94.23 v2(111.633,101.854)
IO17: MD1.28 P3.4 | length 15.6
  Top Layer w0.254: MD1.28 109.407,103.108 113.208,103.108 118.74,97.576 P3.4
IO18: MD1.30 P3.3 | length 15.7
  Top Layer w0.254: MD1.30 116.406,105.971 P3.3
IO19: MD1.31 P3.2 | length 15.1
  Top Layer w0.254: MD1.31 117.636,107.241 P3.2
IO21: MD1.33 P5.1 P5.2 P5.3 P5.4 | length 35.8
  Top Layer w0.254: MD1.33 109.407,109.458 110.252,109.458 v2(110.998,108.712) ; v2(111.887,104.775) 114.935,104.775 v2(116.84,102.87) ; P5.1 P5.2 P5.3 P5.4
  Bottom Layer w0.254: v2(110.998,108.712) 111.887,107.823 v2(111.887,104.775) ; v2(116.84,102.87) 116.84,98.31 121.587,93.563 P5.4
IO22: MD1.36 P6.1 P6.2 P6.3 P6.4 | length 20.8
  Top Layer w0.254: MD1.36 109.407,113.268 113.021,113.268 113.598,112.691 116.843,112.691 117.77,113.618 P6.1 P6.2 P6.3 P6.4
IO23: MD1.37 P4.4 | length 63.9
  Top Layer w0.254: P4.4 74.302,75.695 85.979,87.373 v2(85.979,87.376) ; v2(105.435,90.297) 107.417,92.278 107.417,114.3 107.978,114.861 MD1.37
  Bottom Layer w0.254: v2(85.979,87.376) 102.514,87.376 v2(105.435,90.297)
IO25: MD1.10 P4.3 | length 35.8
  Top Layer w0.254: P4.3 87.959,86.85 87.959,101.295 91.042,104.378 91.761,104.378 MD1.10
IO26: MD1.11 P4.2 | length 33.5
  Top Layer w0.254: P4.2 88.467,84.857 88.467,100.533 91.042,103.108 91.761,103.108 MD1.11
IO27: MD1.12 P4.1 | length 31.1
  Top Layer w0.254: P4.1 88.975,82.866 88.975,99.771 91.042,101.838 91.761,101.838 MD1.12
IO32: MD1.8
IO33: MD1.9
IO34: MD1.6
IO35: MD1.7
NC: MD1.32
NetC1_2: C1.2 R2.2 SW1.4 | length 27.3
  Top Layer w0.254: R2.2 117.221,90.718 117.221,84.289 SW1.4
  Bottom Layer w0.254: C1.2 109.019,80.959 110.392,82.332 SW1.4
NetC4_2: C4.2 R5.2 SW2.4 | length 32.1
  Top Layer w0.254: v2(73.638,111.484) 75.354,113.2 75.354,114.256 R5.2 ; v2(75.946,106.045) 75.946,97.22 SW2.4 ; SW2.4@77.815,95.96 82.729,95.96 83.566,95.123 84.515,95.123 C4.2 C4.2@86.942,92.724
  Bottom Layer w0.254: v2(73.638,111.484) 73.787,111.334 73.787,108.204 v2(75.946,106.045)
NetC8_1: C8.1 R7.1 R8.2 U1.1 | length 36.4
  Top Layer w0.254: R7.1 48.724,117.165 U1.1 ; C8.1 47.458,95.432 R8.2
  Bottom Layer w0.254: R7.1 47.458,118.431 R8.2
NetD2_2: D2.2 R6.1 | length 8
  Top Layer w0.254: R6.1 33.909,102.858 34.671,102.096 D2.2
RX: MD1.34 P1.1 | length 5.9
  Top Layer w0.254: MD1.34 109.407,110.728 112.09,110.728 P1.1
SD0: MD1.21
SD1: MD1.22
SD2: MD1.17
SD3: MD1.18
SENSOR_VN: MD1.5
SENSOR_VP: MD1.4
TX: MD1.35 P1.2 | length 5.4
  Top Layer w0.254: MD1.35 109.407,111.998 111.483,111.998 112.209,111.272 P1.2
pads on no net: SW1.1 SW1.3 SW2.1 SW2.3

## Polygon pours and split planes (outlines as drawn)
GND on Top Layer "GND_L01_P004" (solid, remove dead copper, pour order 4): 30.861,73.152 32.385,71.755 124.968,71.755 ccw(c124.968,73.406) 126.619,73.406 126.619,124.587 ccw(c124.206,124.587) 124.206,127 32.131,127 32.131,126.873 30.861,125.603
GND on Bottom Layer "GND_L02_P005" (solid, remove dead copper, pour order 5): 30.861,73.152 32.385,71.755 124.968,71.755 ccw(c124.968,73.406) 126.619,73.406 126.619,124.587 ccw(c124.206,124.587) 124.206,127 32.131,127 32.131,126.873 30.861,125.603

## Silkscreen, mask and mechanical layers (free items; w line width, h text height)
Top Overlay:
  text "MedMonitor" at 34.417,85.471 h1.52
  text "#IoT #ENTC" at 34.29,82.423 h1.52
Mechanical 1:
  the board outline again, w0.8